# EAGLE board fretscanner-INPUTS-minimal (EAGLE 6.6.0)
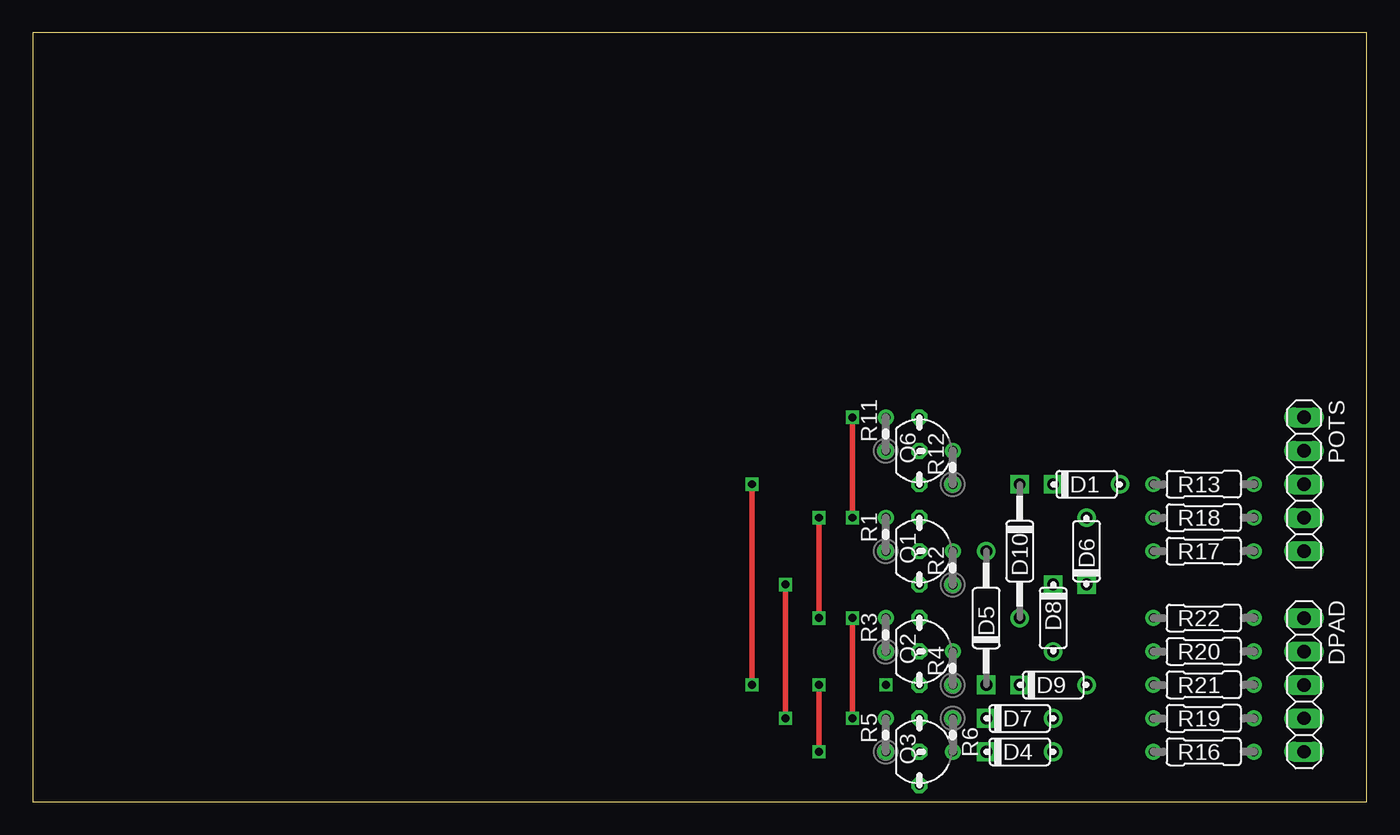
[diagram p0: board, top side]
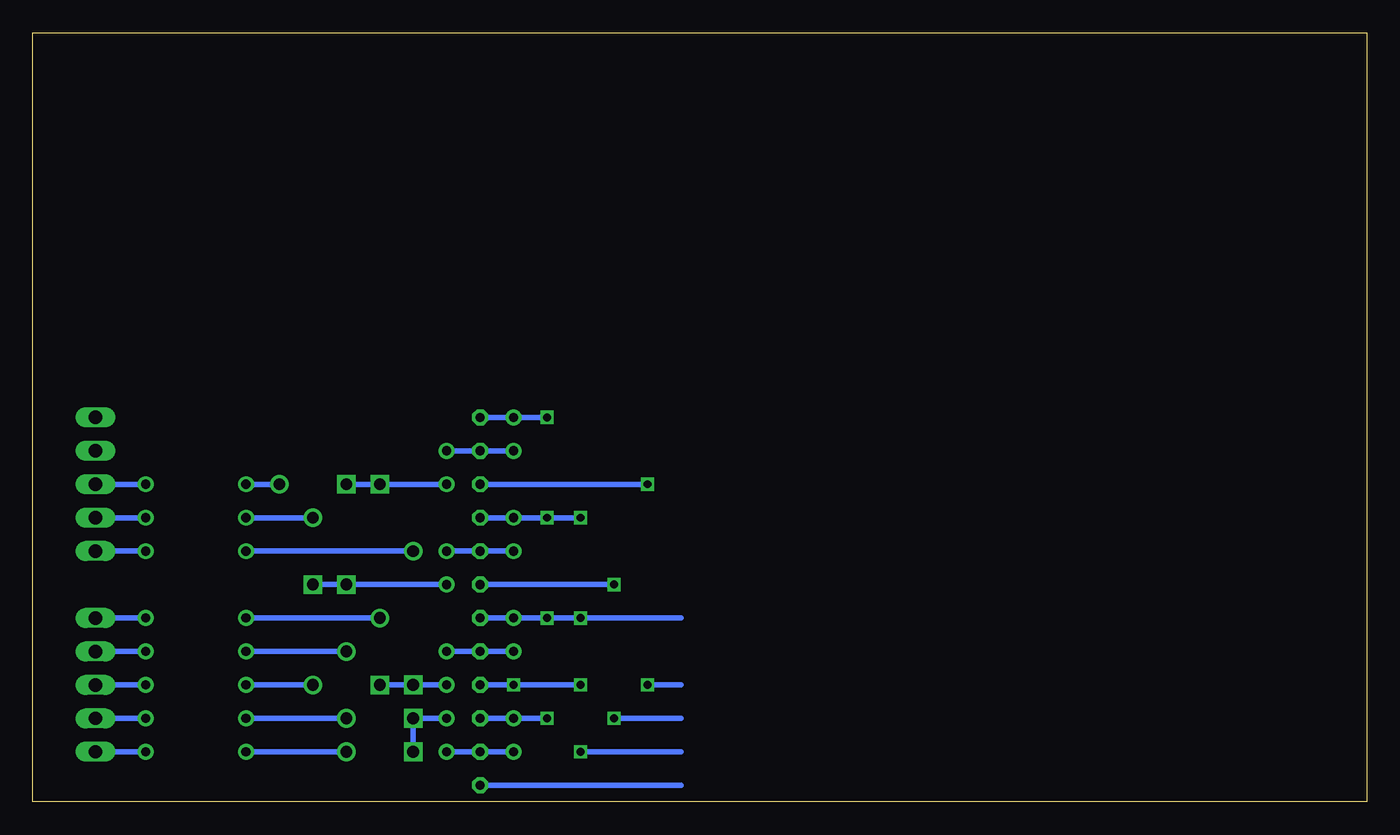
[diagram p1: board, bottom side, seen from below]

Size 101.27 x 58.41 mm. Coordinates in mm from the lower left corner, seen from the top.
Outline: 0,0 101.27,0 101.27,58.41 0,58.41 0,0
Copper layers (1*16): Top 0.035mm / dielectric 1.5mm / Bottom 0.035mm
Design rules "default": minimum track width 10mil, minimum drill 24mil, track to track 8mil, track to pad 8mil, pad to pad 8mil, via to via 8mil, smd to smd 8mil, copper to edge 40mil, drill to drill 8mil, minimum pad ring 10mil, minimum via ring 8mil, stop-mask expansion 4mil, vias tented up to drill 0mil, thermal gap 10mil

## Footprints (pad centres in the part's own frame; a part is rotated, then mirrored left to right if it is on the bottom)
DO35-2 = drill 0.9: A 2.54,0 | drill 0.9 square: C -2.54,0
DO35-4 = drill 0.9 pad 1.422: A 5.08,0 | drill 0.9 pad 1.422 square: C -5.08,0
1X05 = drill 1.016 long: 1 -5.08,0; 2 -2.54,0; 3 0,0; 4 2.54,0; 5 5.08,0
TO92- = drill 0.7 octagon: 1 2.54,0; 2 0,0; 3 -2.54,0
R0207/1V = drill 0.7: 1 -1.27,0; 2 1.27,0
R0207/3 = drill 0.7: 1 -3.81,0; 2 3.81,0

## Placement (x,y rotation side)
D1  1N4148-2  [DO35-2]  80.01,24.13 0 top
D4  1N4148-2  [DO35-2]  74.93,3.81 0 top
D5  1N4148-4  [DO35-4]  72.39,13.97 90 top
D6  1N4148-2  [DO35-2]  80.01,19.05 90 top
D7  1N4148-2  [DO35-2]  74.93,6.35 0 top
D8  1N4148-2  [DO35-2]  77.47,13.97 270 top
D9  1N4148-2  [DO35-2]  77.47,8.89 0 top
D10  1N4148-4  [DO35-4]  74.93,19.05 270 top
DPAD  [1X05]  96.52,8.89 270 top
POTS  [1X05]  96.52,24.13 270 top
Q1  2N3904  [TO92-]  67.31,19.05 270 top
Q2  2N3904  [TO92-]  67.31,11.43 270 top
Q3  2N3904  [TO92-]  67.31,3.81 270 top
Q6  2N3904  [TO92-]  67.31,26.67 270 top
R1  300k  [R0207/1V]  64.77,20.32 90 top
R2  1k  [R0207/1V]  69.85,17.78 90 top
R3  300k  [R0207/1V]  64.77,12.7 90 top
R4  1k  [R0207/1V]  69.85,10.16 90 top
R5  300k  [R0207/1V]  64.77,5.08 90 top
R6  1k  [R0207/1V]  69.85,5.08 270 top
R11  300k  [R0207/1V]  64.77,27.94 90 top
R12  1k  [R0207/1V]  69.85,25.4 90 top
R13  30k  [R0207/3]  88.9,24.13 180 top
R16  30k  [R0207/3]  88.9,3.81 180 top
R17  30k  [R0207/3]  88.9,19.05 180 top
R18  30k  [R0207/3]  88.9,21.59 180 top
R19  30k  [R0207/3]  88.9,6.35 180 top
R20  30k  [R0207/3]  88.9,11.43 180 top
R21  30k  [R0207/3]  88.9,8.89 180 top
R22  30k  [R0207/3]  88.9,13.97 180 top

## Library data of the parts
D1 D4-D10 = gm-diodes
DPAD POTS = pinhead
Q1-Q3 Q6 = gm-trans
R1-R6 R11-R13 R16-R22 = gm-resistors

## Nets
BACK: POTS.4 R18.1
D_DOWN: DPAD.1 R22.1
D_LEFT: DPAD.2 R20.1
D_RIGHT: DPAD.3 R21.1
D_UP: DPAD.4 R19.1
GND: Q1.3 Q2.3 Q3.3 Q6.3 R1.2 R3.2 R5.2 R11.2
N$1: Q3.1
N$2: Q2.2 R3.1 R4.2
N$3: Q2.1
N$4: D5.C D9.C R4.1
N$5: Q3.2 R5.1 R6.2
N$6: Q1.2 R1.1 R2.2
N$7: D6.C D8.C R2.1
N$8: D4.A R16.2
N$9: D5.A R17.2
N$10: D4.C D7.C R6.1
N$11: Q1.1
N$12: D6.A R18.2
N$13: Q6.1
N$15: D1.A R13.2
N$18: Q6.2 R11.1 R12.2
N$20: D1.C D10.C R12.1
N$21: D7.A R19.2
N$22: D8.A R20.2
N$23: D9.A R21.2
N$24: D10.A R22.2
SIDE_B: POTS.5 R17.1
START: POTS.3 R13.1
X_BUTTON: DPAD.5 R16.1

## Tracks (layer width: path | path; a pad name or v marks a point on that pad's centre or on a via)
BACK
  Bottom 0.406: POTS.4 R18.1
D_DOWN
  Bottom 0.406: DPAD.1 R22.1
D_LEFT
  Bottom 0.406: DPAD.2 R20.1
D_RIGHT
  Bottom 0.406: DPAD.3 R21.1
D_UP
  Bottom 0.406: DPAD.4 R19.1
GND  (via drill 0.6)
  Top 0.406: v62.23,6.35 v62.23,13.97 | v59.69,21.59 v59.69,13.97 | v62.23,29.21 v62.23,21.59
  Bottom 0.406: Q6.3 R11.2 v62.23,29.21 | Q3.3 R5.2 v62.23,6.35 | Q1.3 R1.2 v62.23,21.59 v59.69,21.59 | Q2.3 R3.2 v62.23,13.97 v59.69,13.97 52.07,13.97
N$1
  Bottom 0.406: Q3.1 52.07,1.27
N$2
  Bottom 0.406: R3.1 Q2.2 R4.2
N$3  (via drill 0.6)
  Top 0.406: v59.69,3.81 v59.69,8.89
  Bottom 0.406: Q2.1 v64.77,8.89 v59.69,8.89 | 52.07,3.81 v59.69,3.81
N$4
  Bottom 0.406: D9.C D5.C R4.1
N$5
  Bottom 0.406: R5.1 Q3.2 R6.2
N$6
  Bottom 0.406: R2.2 Q1.2 R1.1
N$7
  Bottom 0.406: D6.C D8.C R2.1
N$8
  Bottom 0.406: R16.2 D4.A
N$9
  Bottom 0.406: R17.2 D5.A
N$10
  Bottom 0.406: R6.1 D7.C D4.C
N$11  (via drill 0.6)
  Top 0.406: v57.15,6.35 v57.15,16.51
  Bottom 0.406: 52.07,6.35 v57.15,6.35 | v57.15,16.51 Q1.1
N$12
  Bottom 0.406: R18.2 D6.A
N$13  (via drill 0.6)
  Top 0.406: v54.61,8.89 v54.61,24.13
  Bottom 0.406: 52.07,8.89 v54.61,8.89 | v54.61,24.13 Q6.1
N$15
  Bottom 0.406: R13.2 D1.A
N$18
  Bottom 0.406: R11.1 Q6.2 R12.2
N$20
  Bottom 0.406: D1.C D10.C R12.1
N$21
  Bottom 0.406: R19.2 D7.A
N$22
  Bottom 0.406: R20.2 D8.A
N$23
  Bottom 0.406: R21.2 D9.A
N$24
  Bottom 0.406: R22.2 D10.A
SIDE_B
  Bottom 0.406: POTS.5 R17.1
START
  Bottom 0.406: POTS.3 R13.1
X_BUTTON
  Bottom 0.406: DPAD.5 R16.1